# EAGLE board SMD_Breakout (EAGLE 7.3.0)
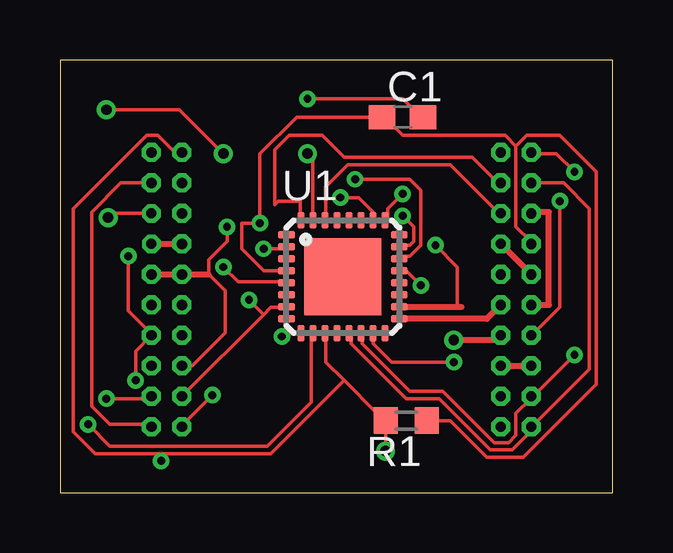
[diagram p0: board, top side]
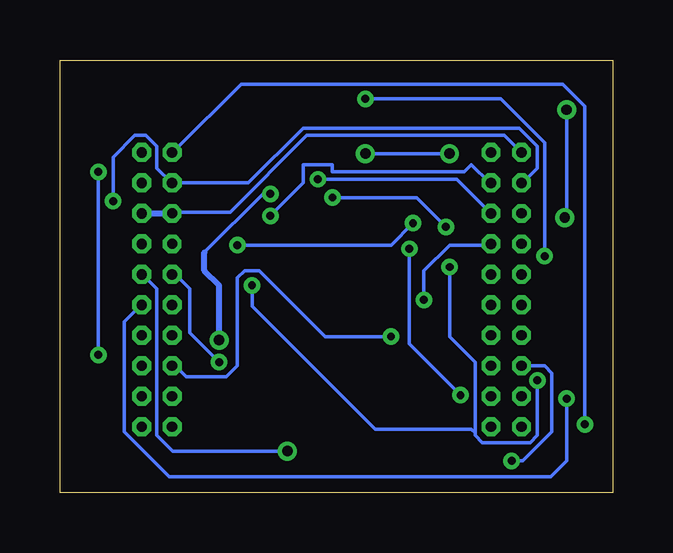
[diagram p1: board, bottom side, seen from below]

Size 23.04 x 18.02 mm. Coordinates in mm from the lower left corner, seen from the top.
Outline: 0,0 23.04,0 23.04,18.02 0,18.02 0,0
Copper layers (1*16): Top 0.0356mm / dielectric 1.5011mm / Bottom 0.0356mm
Design rules "LaenPCBOrder": minimum track width 6mil, minimum drill 13mil, track to track 6mil, track to pad 6mil, pad to pad 6mil, via to via 6mil, smd to smd 6mil, copper to edge 15mil, drill to drill 6mil, minimum pad ring 7mil, minimum via ring 7mil, stop-mask expansion 3mil, vias tented up to drill 0mil, thermal gap 10mil

## Footprints (pad centres in the part's own frame; a part is rotated, then mirrored left to right if it is on the bottom)
C0603 = smd 1.1 x 1: 1 -0.85,0; 2 0.85,0
2X10_CUSTOM = drill 0.432 pad 0.711 octagon: PIN1 0,0; PIN2 0,1.27; PIN3 1.27,0; PIN4 1.27,1.27; PIN6 2.54,1.27; PIN8 3.81,1.27; PIN9 5.08,0; PIN10 5.08,1.27; PIN11 6.35,0; PIN12 6.35,1.27; PIN13 7.62,0; PIN14 7.62,1.27; PIN15 8.89,0; PIN16 8.89,1.27; PIN17 10.16,0; PIN18 10.16,1.27; PIN19 11.43,0; PIN20 11.43,1.27 | drill 0.42 pad 0.71 octagon: PIN5 2.54,0; PIN7 3.81,0
R0603 = smd 1 x 1.1: 1 -0.85,0; 2 0.85,0
MLF32-TH = smd 0.7 x 0.3: 1 -2.35,1.75; 2 -2.35,1.25; 3 -2.35,0.75; 4 -2.35,0.25; 5 -2.35,-0.25; 6 -2.35,-0.75; 7 -2.35,-1.25; 8 -2.35,-1.75; 17 2.35,-1.75; 18 2.35,-1.25; 19 2.35,-0.75; 20 2.35,-0.25; 21 2.35,0.25; 22 2.35,0.75; 23 2.35,1.25; 24 2.35,1.75 | smd 0.3 x 0.7: 9 -1.75,-2.35; 10 -1.25,-2.35; 11 -0.75,-2.35; 12 -0.25,-2.35; 13 0.25,-2.35; 14 0.75,-2.35; 15 1.25,-2.35; 16 1.75,-2.35; 25 1.75,2.35; 26 1.25,2.35; 27 0.75,2.35; 28 0.25,2.35; 29 -0.25,2.35; 30 -0.75,2.35; 31 -1.25,2.35; 32 -1.75,2.35 | smd 3.2 x 3.2: TH 0,0

## Placement (x,y rotation side)
C1  [C0603]  14.27,15.65 0 top
IN  2X10_0.05_HEADERCUSTOM1  [2X10_CUSTOM]  3.81,14.17 270 top
OUT  2X10_0.05_HEADERCUSTOM1  [2X10_CUSTOM]  18.36,14.17 270 top
R1  [R0603]  14.43,3 180 top
U1  ATTINY461A-SUMLF-32-TH  [MLF32-TH]  11.79,8.99 0 top

## Library data of the parts
C1 R1 = rcl
IN OUT = Custom
U1 = Atmel_By_element14_Batch_1-00

## Nets
ABOVE: OUT.PIN1 U1.10
BELOW: IN.PIN20 U1.2
ELED: OUT.PIN9 U1.15
GND: C1.2 IN.PIN13 U1.5 U1.21
LEFT: IN.PIN5 U1.31
M_CLK: OUT.PIN2 OUT.PIN18 U1.14
MDO: OUT.PIN4 OUT.PIN20 U1.13
PA2: IN.PIN4 U1.23
PA3: IN.PIN6 U1.22
POT: OUT.PIN13 U1.25
RESET: IN.PIN2 IN.PIN15 OUT.PIN7 OUT.PIN10 R1.2 U1.11
RIGHT: OUT.PIN15 OUT.PIN16 U1.8
S_CLK: IN.PIN7 IN.PIN8 IN.PIN18 U1.7
SCL: IN.PIN3 IN.PIN19 OUT.PIN3 OUT.PIN14 U1.32
SDA: IN.PIN1 IN.PIN17 OUT.PIN5 OUT.PIN6 OUT.PIN12 U1.30
SDI: IN.PIN9 IN.PIN10 IN.PIN16 U1.26
SLED: OUT.PIN11 U1.17
VDD: C1.1 OUT.PIN8 R1.1 U1.4 U1.18

## Tracks (layer width: path | path; a pad name or v marks a point on that pad's centre or on a via)
ABOVE  (via drill 0.33)
  Top 0.152: v1.17,2.85 2.08,1.93 8.64,1.93 10.46,3.76 10.46,6.5 U1.10
  Bottom 0.152: v1.17,2.85 1.17,16.1 2.08,17.02 15.49,17.02 18.24,14.28 OUT.PIN1
BELOW  (via drill 0.33)
  Top 0.152: v8.48,10.16 9.4,10.16 U1.2 | v6.35,4.06 5.13,2.85 IN.PIN20
  Bottom 0.152: v8.48,10.16 8.48,6.2 v6.35,4.06
ELED  (via drill 0.33)
  Top 0.152: v16.41,5.44 13.82,5.44 13.06,6.2 13.06,6.5 U1.15
  Bottom 0.152: v16.41,5.44 17.63,6.66 17.63,8.48 18.24,9.09 OUT.PIN9
GND  (via drill 0.33)
  Top 0.152: v10.31,16.41 14.28,16.41 15.04,15.65 C1.2 | v2.85,9.86 2.85,7.57 3.76,6.66 IN.PIN13 3.15,5.89 v3.15,4.67 | v6.81,9.4 7.42,8.79 9.4,8.79 U1.5 | v15.04,8.64 14.43,9.25 14.28,9.25 U1.21
  Bottom 0.152: v10.31,16.41 4.67,16.41 2.85,14.58 v2.85,9.86 | v6.81,9.4 6.81,6.5 5.74,5.44 5.74,2.49 | 5.74,2.49 5.74,2.39 5.44,2.08 3.45,2.08 3.15,2.39 v3.15,4.67 | v15.04,8.64 15.04,7.77 9.91,2.64 5.89,2.64 5.74,2.49
LEFT  (via drill 0.43)
  Top 0.152: U1.31 10.54,13.9 v10.31,14.12 | v6.81,14.12 4.98,15.95 v1.93,15.95 | v2.01,11.46 2.01,11.63 IN.PIN5
  Bottom 0.152: v10.31,14.12 v6.81,14.12 | v1.93,15.95 1.93,11.46 v2.01,11.46
M_CLK  (via drill 0.33)
  Top 0.152: U1.14 12.6,6.5 12.6,6.2 14.58,4.22 15.95,4.22 18.09,2.08 18.69,2.08 19,2.39 19,3.3 19.61,3.91 OUT.PIN18 19.76,4.06 v21.44,5.74 | v21.44,13.36 20.68,14.12 19.76,14.12 OUT.PIN2
  Bottom 0.152: v21.44,5.74 v21.44,13.36
MDO
  Top 0.152: U1.13 12.14,6.5 12.14,6.2 14.43,3.91 15.8,3.91 17.93,1.78 18.85,1.78 19.76,2.69 OUT.PIN20 19.76,2.85 22.05,5.13 22.05,11.84 20.98,12.9 OUT.PIN4
PA2  (via drill 0.33)
  Top 0.152: v14.28,11.53 14.73,11.07 14.73,10.46 14.58,10.31 14.28,10.31 U1.23
  Bottom 0.152: v14.28,11.53 12.9,12.9 12.9,13.66 11.68,13.66 11.68,13.36 6.2,13.36 5.89,13.66 5.13,12.9 IN.PIN4
PA3  (via drill 0.33)
  Top 0.152: v12.29,13.06 14.58,13.06 15.04,12.6 15.04,10.31 14.58,9.86 14.28,9.86 U1.22
  Bottom 0.152: v12.29,13.06 6.5,13.06 IN.PIN6
POT  (via drill 0.33, 0.43)
  Top 0.152: v14.28,12.45 13.66,11.84 13.66,11.38 U1.25
  Top 0.254: OUT.PIN13 18.16,6.35 v16.41,6.35
  Bottom 0.152: v14.28,12.45 14.58,12.45 17.02,10.01
  Bottom 0.254: v16.41,6.35 16.41,8.64 17.02,9.25 17.02,10.01
RESET  (via drill 0.33, 0.43)
  Top 0.152: 5.13,14.28 IN.PIN2 4.98,14.28 4.67,14.28 4.06,14.88 3.61,14.88 0.56,11.84 0.56,2.54 1.47,1.63 4.22,1.63 | 13.28,3.3 R1.2 | 11.84,4.67 13.21,3.3 R1.2 | 11.84,4.67 11.07,5.44 11.07,6.5 U1.11 | 4.22,1.63 8.79,1.63 11.84,4.67 | v4.22,1.32 4.22,1.63 | v13.56,1.73 13.58,1.74 R1.2
  Top 0.254: OUT.PIN10 OUT.PIN7
  Bottom 0.152: IN.PIN15 2.85,5.28 2.54,4.98 2.54,2.54 3.76,1.32 v4.22,1.32 | OUT.PIN10 19.61,9.09 19,8.48 19,2.39 18.34,1.73 v13.56,1.73
RIGHT  (via drill 0.33)
  Top 0.152: v9.25,6.5 9.4,6.66 9.4,7.11 U1.8
  Top 0.254: OUT.PIN15 OUT.PIN16
  Bottom 0.152: v9.25,6.5 11.99,6.5 14.73,9.25 15.34,9.25 15.65,8.94 15.65,5.28 16.1,4.83 17.78,4.83 18.24,5.28 OUT.PIN15
S_CLK  (via drill 0.33)
  Top 0.152: IN.PIN18 8.48,7.42 | 8.48,7.42 8.79,7.72 9.4,7.72 U1.7 | 8.48,7.42 v7.87,8.03
  Top 0.254: IN.PIN7 IN.PIN8
  Bottom 0.152: v7.87,8.03 7.87,9.25 6.81,10.31 5.13,10.31 IN.PIN8
SCL  (via drill 0.33)
  Top 0.152: U1.32 10.01,11.38 10.01,12.14 9.09,12.14 8.94,11.99 8.94,14.28 9.55,14.88 10.92,14.88 11.84,13.97 17.17,13.97 18.24,12.9 OUT.PIN3 | IN.PIN3 2.54,12.9 1.32,11.68 1.32,3.61 2.08,2.85 3.76,2.85 IN.PIN19 | v20.83,12.14 20.83,7.72 19.76,6.66 OUT.PIN14
  Bottom 0.152: IN.PIN3 3.76,12.9 3.15,13.51 3.15,14.43 3.91,15.19 12.9,15.19 15.19,12.9 OUT.PIN3 18.39,12.9 19,13.51 19,14.43 19.46,14.88 19.91,14.88 20.83,13.97 v20.83,12.14
SDA  (via drill 0.33)
  Top 0.152: U1.30 11.07,11.38 11.07,12.75 11.99,13.66 16.26,13.66 18.24,11.68 OUT.PIN5 | v1.93,3.91 3.76,3.91 IN.PIN17
  Top 0.254: OUT.PIN12 20.37,7.82 20.37,11.68 19.63,11.68 OUT.PIN6
  Bottom 0.152: IN.PIN1 4.52,14.88 12.75,14.88 15.95,11.68 18.24,11.68 OUT.PIN5 | 1.93,2.69 v1.93,3.91 1.93,1.32 2.59,0.66 18.49,0.66 20.37,2.54 20.37,7.11 19.76,7.72 OUT.PIN12
  Bottom 0.254: OUT.PIN6 OUT.PIN5
SDI  (via drill 0.33)
  Top 0.152: v11.68,12.29 12.45,12.29 13.06,11.68 13.06,11.38 U1.26 | v6.96,11.07 6.96,10.46 6.2,9.7 6.2,9.09 6.88,8.41 6.88,6.66 5.51,5.28 IN.PIN16
  Top 0.254: IN.PIN9 IN.PIN10 6.2,9.09
  Bottom 0.152: v11.68,12.29 8.18,12.29 v6.96,11.07
SLED
  Top 0.254: OUT.PIN11 17.78,7.24 U1.17
VDD  (via drill 0.33)
  Top 0.152: U1.4 9.4,9.25 8.48,9.25 7.57,10.16 7.57,11.23 v8.33,11.23 8.33,14.12 9.86,15.65 C1.1 13.51,15.65 14.28,14.88 18.54,14.88 19,14.43 | v15.65,10.31 16.56,9.4 16.56,7.74 16.56,7.72 | 19,14.43 19,11.07 19.61,10.46 OUT.PIN8 | R1.1 16.26,3 17.78,1.47 19.3,1.47 22.35,4.52 22.35,13.36 20.83,14.88 19.46,14.88 19,14.43
  Top 0.254: U1.18 16.56,7.74 16.73,7.74
  Bottom 0.152: v15.65,10.31 9.25,10.31 v8.33,11.23